# Altium PCB Vertical Circuit Board.PcbDoc
Units mm, origin at the board's own origin, x right, y up, seen from the top; angles counter-clockwise.
Board outline 141 x 80 mm, 2 copper layers (Top Layer, Bottom Layer); 58 components, 57 nets, 183 pads, 8 vias.
Unrouted connection lines stored in the file: 3.
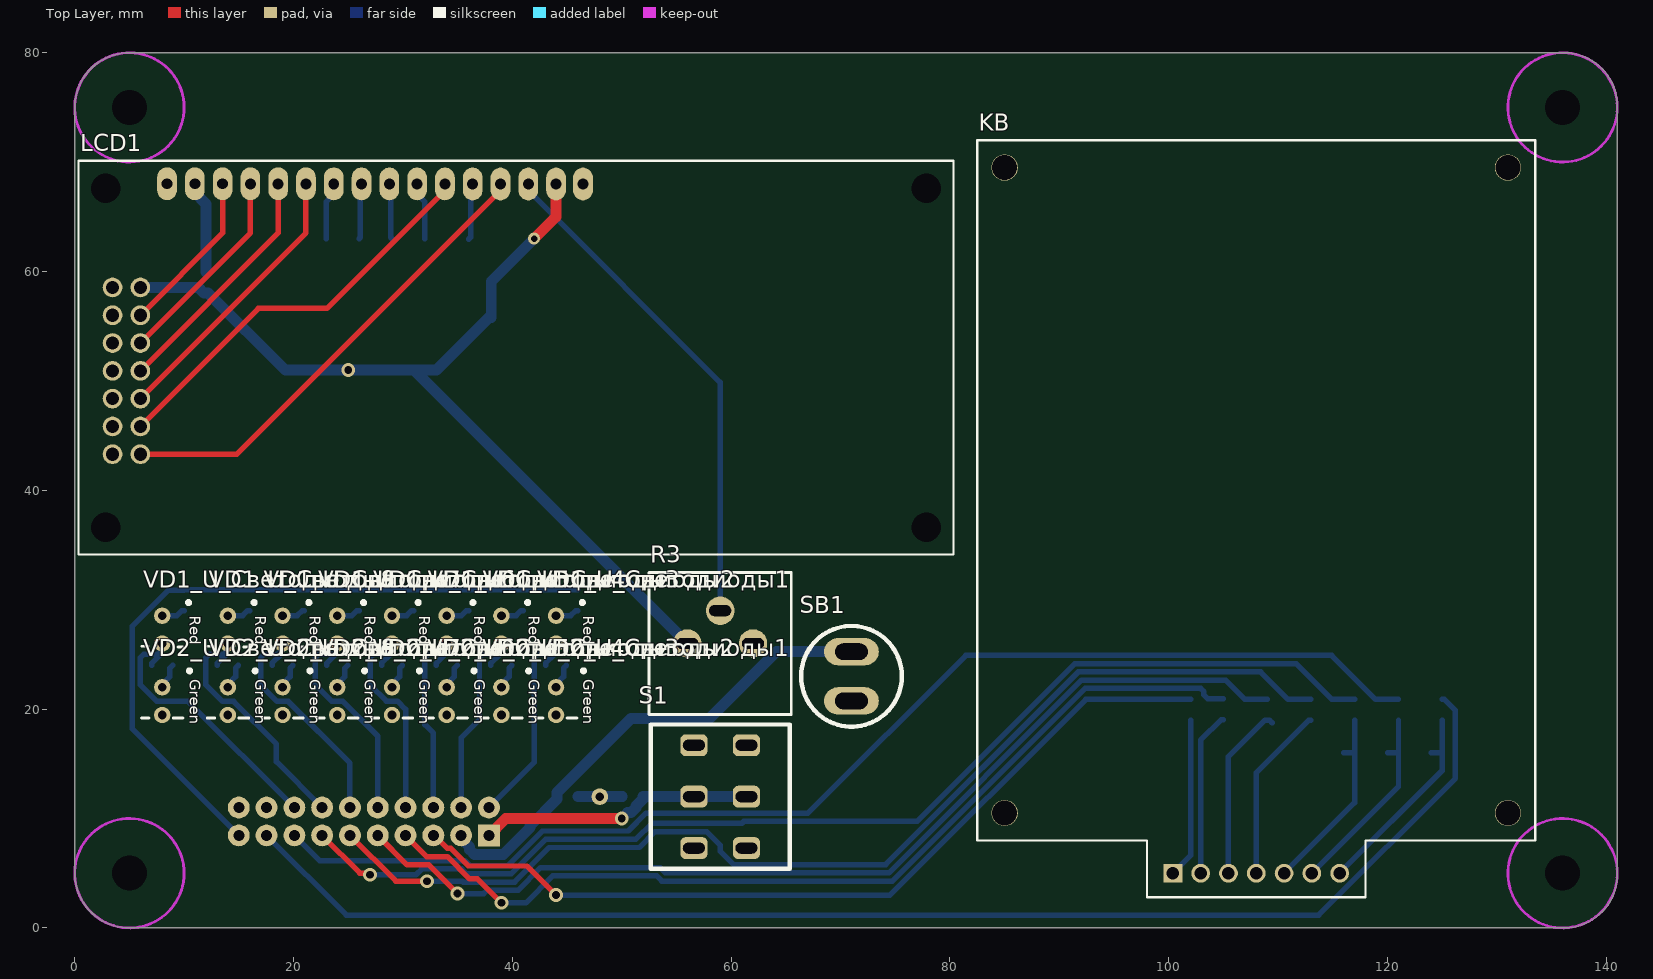
[diagram p0: Top Layer view]
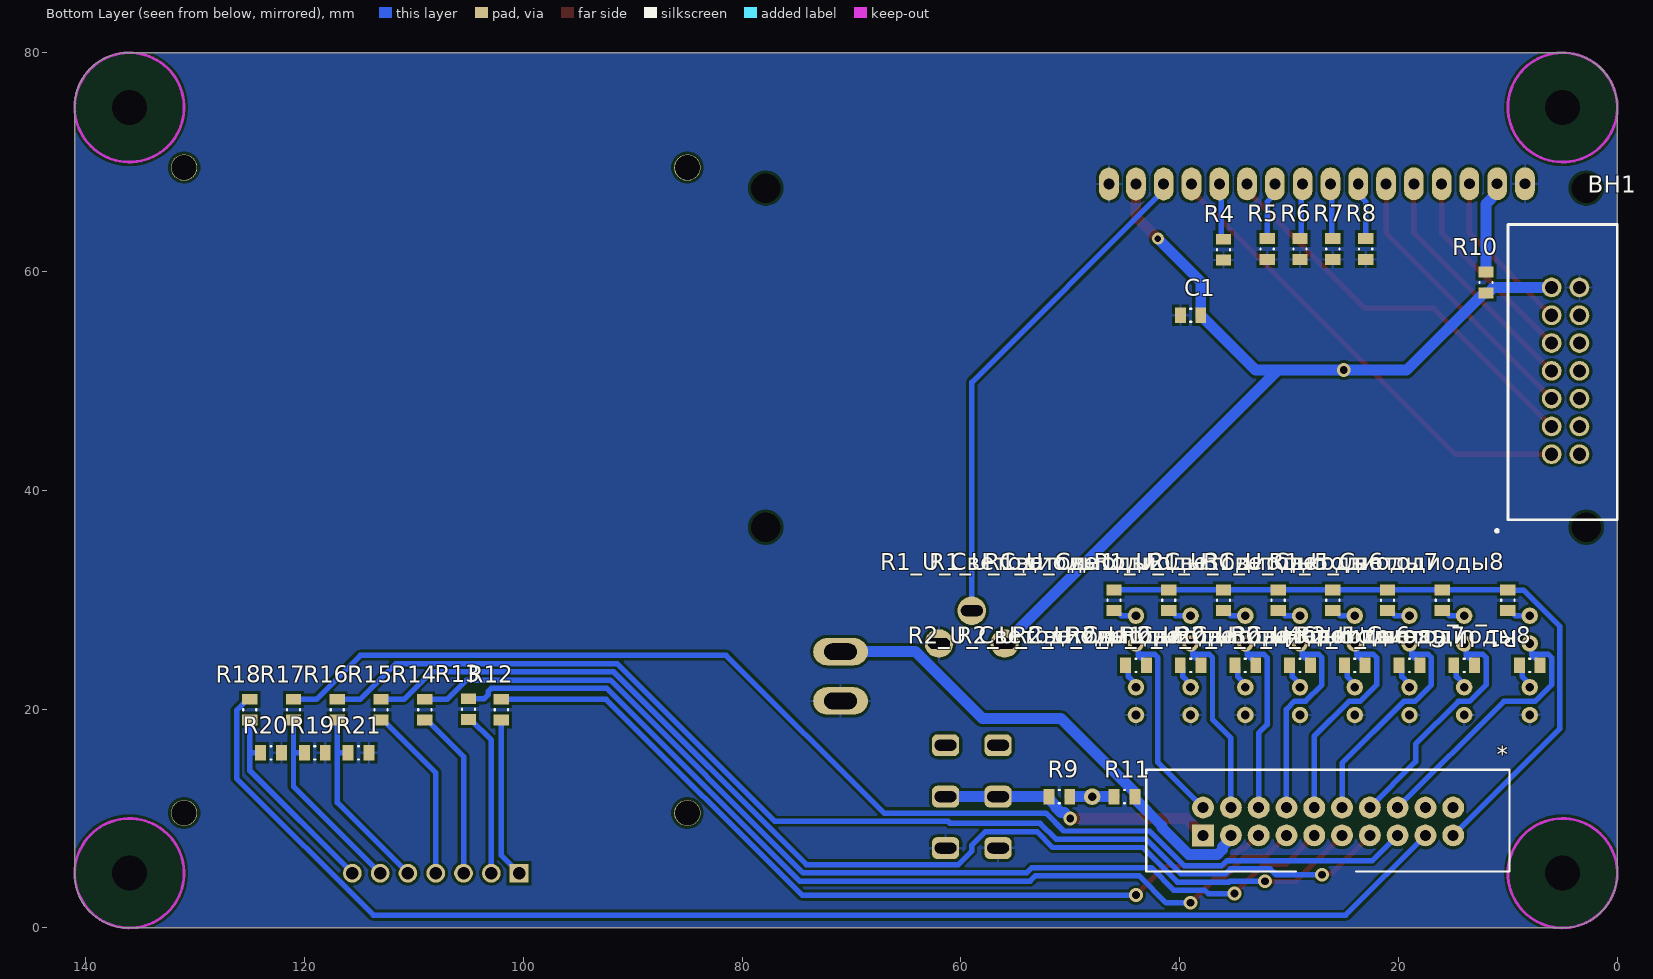
[diagram p1: Bottom Layer view, seen from below]
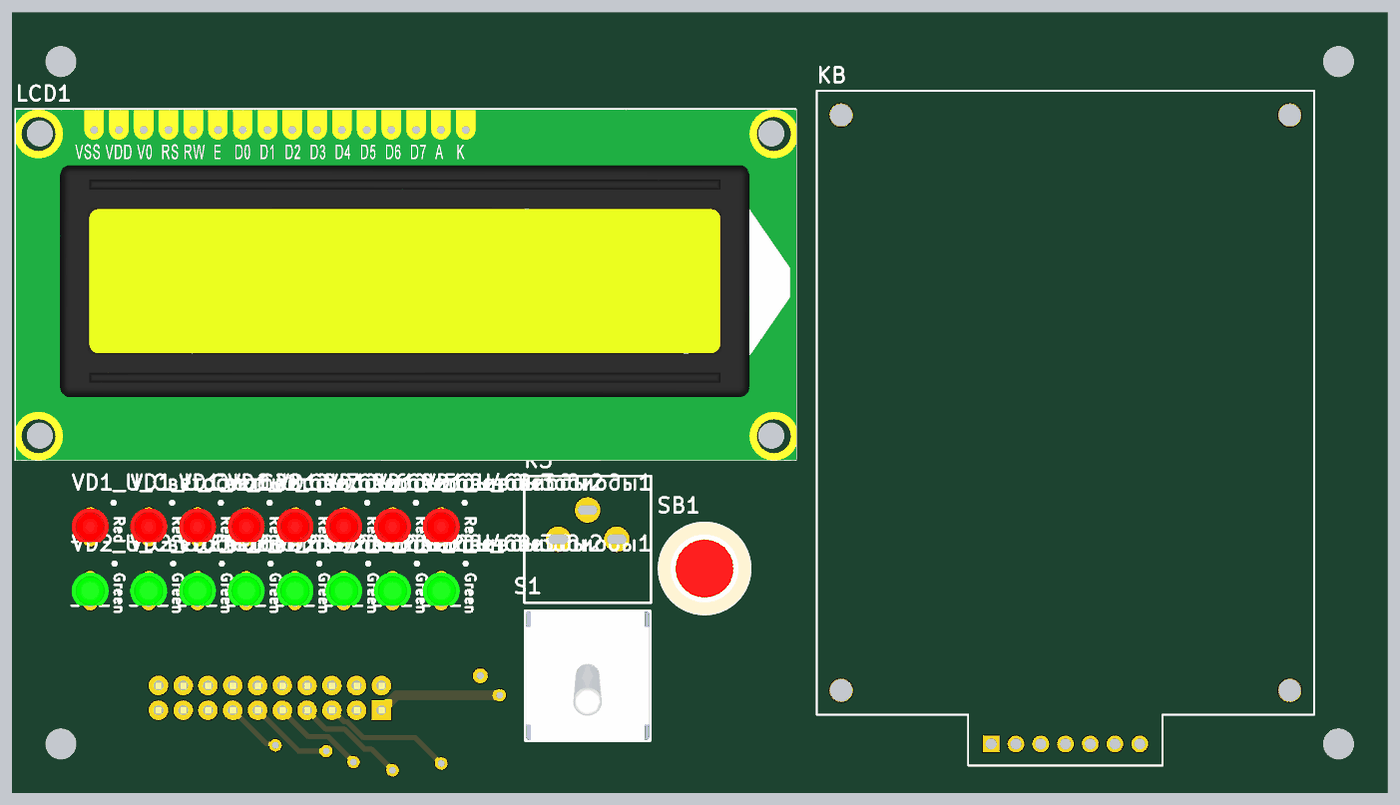
[diagram p2: 3D render of the assembled board from above, using the file's embedded part models]
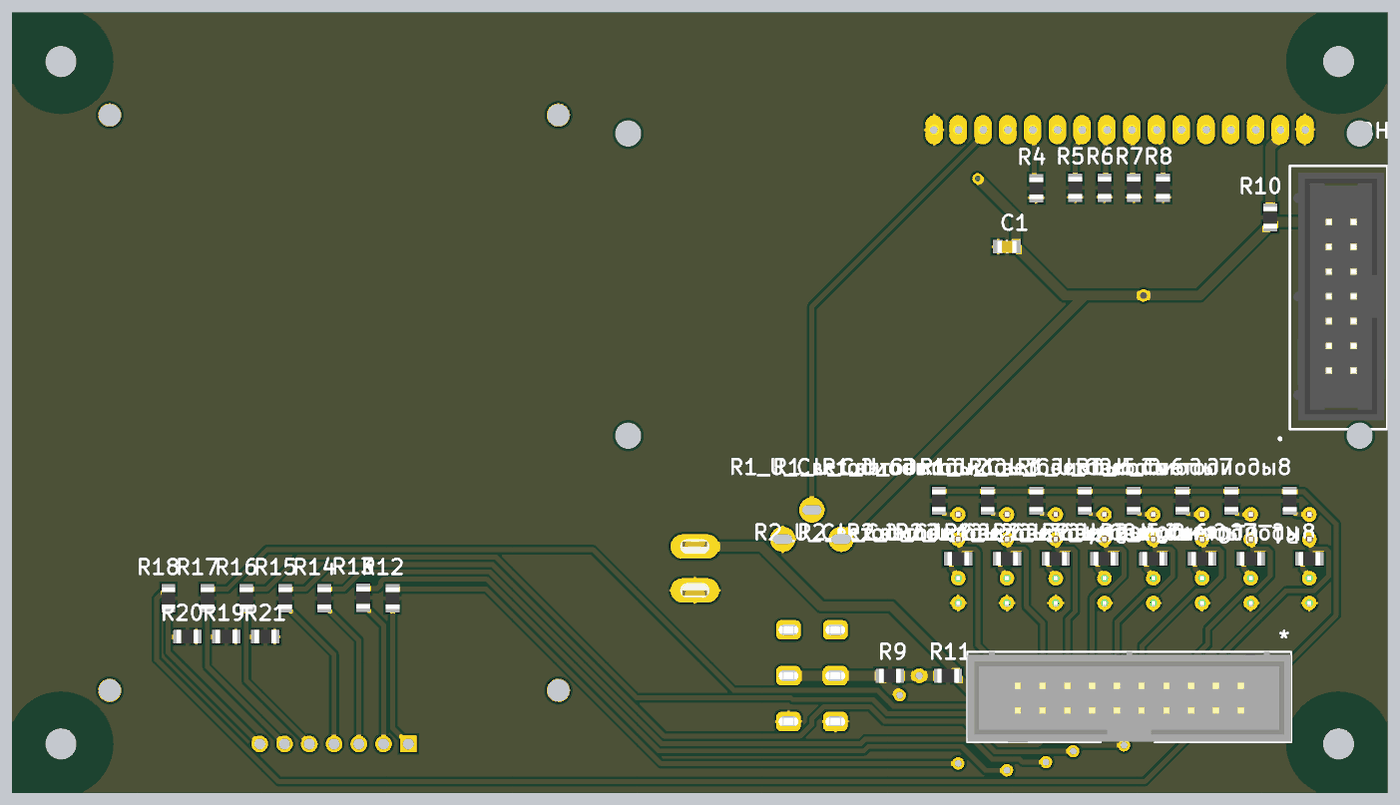
[diagram p3: 3D render of the assembled board from below, using the file's embedded part models]

## Layer stack, top to bottom
Top Solder: solder mask 0.0102, Solder Resist, Dk 3.5
Top Layer: signal copper 0.0356
Dielectric 1: dielectric 0.32, FR-4, Dk 4.8
Bottom Layer: signal copper 0.0356
Bottom Solder: solder mask 0.0102, Solder Resist, Dk 3.5

## Board outline
0,5 ccw(c5,5) 5,0 95,0 136.25,0 ccw(c136.125,4.875) 141,5 141,75 ccw(c136.125,75.125) 136.25,80 5,80 ccw(c5,75) 0,75

## Design rules (kind name [scope] priority, off if disabled: settings)
Clearance [All] p1: gap=0.254 ignorepadtopadclearanceinfootprint=FALSE except(0: Arc-Hole Track-Hole SMDPad-Hole THPad-Hole Via-Hole Fill-Hole Poly-Hole Region-Hole Text-Hole)
Height [All] p1: minheight=0 maxheight=50 prefheight=12.7
PolygonConnect [All] p1: connectstyle=Relief reliefconductorwidth=0.254 reliefentries=4 polygonreliefangle="90 Angle" airgapwidth=0.254
RoutingVias [All] p1: holewidth=0.711 width=1.27 viastyle="Through Hole" minholewidth=0.711 minwidth=1.27 maxholewidth=0.711 maxwidth=1.27
SolderMaskExpansion [All] p1: expansion=0.102 istentingtop=FALSE
Width [All] p1: maxlimit=1 minlimit=0.254 preferedwidth=0.5 minimp=50.000000 maximp=50.000000 favimp=50.000000
29 further rules are at their usual default settings.

## Components (designator, comment, footprint, x,y, rotation, side; value= is the part's Value field where it differs from the comment)
* "BH20" IDC20 27.319,13.286 r90 bottom
BH1 "BH14(1)" "BH-14 (DS1013-14S) (IDC-14MS)" 6,43.3 r90 bottom
C1 "*" C(ceramic) 39,56 r180 bottom
KB "AK-304" AK-304-N-BBW 108,40 r0 top
LCD1 "BCB1602" BCB1602 2.84,36.623 r0 top
R1_U_Светодиоды1 "R" R 46,29.95 r90 bottom (schematic designator R1)
R1_U_Светодиоды2 "R" R 41,29.95 r90 bottom (schematic designator R1)
R1_U_Светодиоды3 "R" R 36,29.95 r90 bottom (schematic designator R1)
R1_U_Светодиоды4 "R" R 31,29.95 r90 bottom (schematic designator R1)
R1_U_Светодиоды5 "R" R 26,29.95 r90 bottom (schematic designator R1)
R1_U_Светодиоды6 "R" R 21,29.95 r90 bottom (schematic designator R1)
R1_U_Светодиоды7 "R" R 16,29.95 r90 bottom (schematic designator R1)
R1_U_Светодиоды8 "R" R 10,29.95 r90 bottom (schematic designator R1)
R2_U_Светодиоды1 "R" R 44,24 r180 bottom (schematic designator R2)
R2_U_Светодиоды2 "R" R 39,24 r180 bottom (schematic designator R2)
R2_U_Светодиоды3 "R" R 34,24 r180 bottom (schematic designator R2)
R2_U_Светодиоды4 "R" R 29,24 r180 bottom (schematic designator R2)
R2_U_Светодиоды5 "R" R 24,24 r180 bottom (schematic designator R2)
R2_U_Светодиоды6 "R" R 19,24 r180 bottom (schematic designator R2)
R2_U_Светодиоды7 "R" R 14,24 r180 bottom (schematic designator R2)
R2_U_Светодиоды8 "R" R 8,24 r180 bottom (schematic designator R2)
R3 "" R(подстр) 59,26 r0 top
R4 "*" R 36,62 r270 bottom
R5 "*" R 32,62.05 r270 bottom
R6 "*" R 29,62.05 r270 bottom
R7 "*" R 26,62.05 r270 bottom
R8 "*" R 23,62.05 r270 bottom
R9 "R" R 51,12 r0 bottom
R10 "*" R 12,59 r270 bottom
R11 "*" R 45.05,12 r180 bottom
R12 "R" R 102,19.95 r270 bottom
R13 "R" R 105,20 r270 bottom
R14 "R" R 109,19.95 r270 bottom
R15 "R" R 113,19.95 r270 bottom
R16 "R" R 117,19.95 r270 bottom
R17 "R" R 121,19.95 r270 bottom
R18 "R" R 125,19.95 r270 bottom
R19 "R" R 119.05,16 r0 bottom
R20 "R" R 123.05,16 r0 bottom
R21 "R" R 115.05,16 r0 bottom
S1 "(?)тумблер" MTS-2 59,12 r180 top
SB1 "ПУСК" кнопка 71,23 r180 top
VD1_U_Светодиоды1 "L-934(RED)" L-934(RED) 44,28.54 r270 top (schematic designator VD1)
VD1_U_Светодиоды2 "L-934(RED)" L-934(RED) 39,28.54 r270 top (schematic designator VD1)
VD1_U_Светодиоды3 "L-934(RED)" L-934(RED) 34,28.54 r270 top (schematic designator VD1)
VD1_U_Светодиоды4 "L-934(RED)" L-934(RED) 29,28.54 r270 top (schematic designator VD1)
VD1_U_Светодиоды5 "L-934(RED)" L-934(RED) 24,28.54 r270 top (schematic designator VD1)
VD1_U_Светодиоды6 "L-934(RED)" L-934(RED) 19,28.54 r270 top (schematic designator VD1)
VD1_U_Светодиоды7 "L-934(RED)" L-934(RED) 14,28.54 r270 top (schematic designator VD1)
VD1_U_Светодиоды8 "L-934(RED)" L-934(RED) 8,28.54 r270 top (schematic designator VD1)
VD2_U_Светодиоды1 "L-934(GREEN)" L-934(GREEN) 44,22 r270 top (schematic designator VD2)
VD2_U_Светодиоды2 "L-934(GREEN)" L-934(GREEN) 39,22 r270 top (schematic designator VD2)
VD2_U_Светодиоды3 "L-934(GREEN)" L-934(GREEN) 34,22 r270 top (schematic designator VD2)
VD2_U_Светодиоды4 "L-934(GREEN)" L-934(GREEN) 29,22 r270 top (schematic designator VD2)
VD2_U_Светодиоды5 "L-934(GREEN)" L-934(GREEN) 24,22 r270 top (schematic designator VD2)
VD2_U_Светодиоды6 "L-934(GREEN)" L-934(GREEN) 19,22 r270 top (schematic designator VD2)
VD2_U_Светодиоды7 "L-934(GREEN)" L-934(GREEN) 14,22 r270 top (schematic designator VD2)
VD2_U_Светодиоды8 "L-934(GREEN)" L-934(GREEN) 8,22 r270 top (schematic designator VD2)

## Footprints (in the part's own frame and the unit in brackets; to place one, negate y for a bottom-side part, rotate by r counter-clockwise, add the part's x,y. Pads: shape width x height; smd on the part's side, far side on the other; paste and mask are expansions set on the pad)
AK-304-N-BBW [mm]
  rect 1.71x1.71 hole 1.14: 1(-7.62,-35)
  round 1.71 hole 1.14: 2(-5.08,-35) 3(-2.54,-35) 4(0,-35) 5(2.54,-35) 6(5.08,-35) 7(7.62,-35)
  round 2.4 hole 2.3 unplated: ""(-23,-29.5) ""(-23,29.5) ""(23,-29.5) ""(23,29.5)
  silkscreen extent -25.5,-37.2 25.5,32
BCB1602 [mm]
  oval 1.8x3 hole 1: 1(43.62,31.376) 2(41.16,31.377) 3(38.62,31.379) 4(36.08,31.381) 5(33.54,31.382) 6(31,31.384) 7(28.46,31.385) 8(25.92,31.387) 9(23.38,31.389) 10(20.84,31.39) 11(18.3,31.392) 12(15.76,31.394) 13(13.22,31.395) 14(10.68,31.397) 15(8.14,31.398) 16(5.6,31.4)
  round 2.5 hole 2.7 unplated: *(0,0) *(0,31) *(75,0) *(75,31)
  silkscreen extent -2.5,-2.5 77.5,33.5, body extent -2.43,-2.55 77.57,33.45, height 17.05
"BH-14 (DS1013-14S) (IDC-14MS)" [mm]
  round 1.8 hole 1.2: 1(0,0) 2(2.54,0) 3(5.08,0) 4(7.62,0) 5(10.16,0) 6(12.7,0) 7(15.24,0) 8(0,-2.54) 9(2.54,-2.54) 10(5.08,-2.54) 11(7.62,-2.54) 12(10.16,-2.54) 13(12.7,-2.54) 14(15.24,-2.54)
  silkscreen extent -7.12,-6 21,5.13, body extent -5.1,-5.7 20.3,3.65, height 10.25
C(ceramic) [mm] "Chip Capacitor, 2-Leads, Body 2,00x1,25mm, IPC Medium Density"
  rect 1x1.4 smd: 1(-0.925,0) 2(0.925,0)
  silkscreen extent -0.05,-0.6 0.05,0.6, body extent -1,-0.63 1,0.63, height 1.3
IDC20 [mm]
  rect 2x2 hole 1: 1(-4.826,10.541)
  round 2 hole 1: 2(-4.826,8.001) 3(-4.826,5.461) 4(-4.826,2.921) 5(-4.826,0.381) 6(-4.826,-2.159) 7(-4.826,-4.699) 8(-4.826,-7.239) 9(-4.826,-9.779) 10(-4.826,-12.319) 11(-2.286,10.541) 12(-2.286,8.001) 13(-2.286,5.461) 14(-2.286,2.921) 15(-2.286,0.381) 16(-2.286,-2.159) 17(-2.286,-4.699) 18(-2.286,-7.239) 19(-2.286,-9.779) 20(-2.286,-12.319)
  silkscreen extent -8.13,-17.46 1.17,15.74, body extent -8.13,-17.46 1.17,15.74, height 9.1
L-934(GREEN) [mm]
  round 1.5 hole 0.8: 1(0,0) 2(2.54,0)
  silkscreen extent -1.64,-1.89 2.81,2.64, body extent -0.61,-1.9 2.81,1.9, height 5.64
L-934(RED) [mm]
  round 1.5 hole 0.8: 1(0,0) 2(2.54,0)
  silkscreen extent -1.34,-1.85 2.85,2.54, body extent -0.65,-1.9 2.85,1.9, height 6
MTS-2 [mm]
  rrect50% 2.5x2 hole 1 slot 2 at 0 deg: 1(-2.4,4.7) 1(2.4,4.7) 2(-2.4,0) 2(2.4,0) 3(-2.4,-4.7) 3(2.4,-4.7)
  silkscreen extent -6.35,-6.6 6.35,6.6, body extent -6.35,-6.6 6.35,6.6, height 29.34
R [mm] "Chip Resistor, 2-Leads, Body 2,10x1,30mm, IPC Medium Density"
  rect 1x1.4 smd: 1(-0.95,0) 2(0.95,0)
  silkscreen extent -0.05,-0.6 0.05,0.6, body extent -1.1,-0.7 1.1,0.7, height 0.6
R(подстр) [mm]
  round 2.6 hole 1 slot 2 at 0 deg: 1(-3,0) 2(3,0) 3(0,3)
  silkscreen extent -6.5,-6.5 6.5,6.5, body extent -6.5,-6.3 6.3,6.5, height 6
кнопка [mm]
  oval 5x2.5 hole 1.5 slot 3 at 0 deg: 1(0,2.25) 2(0,-2.25)
  silkscreen extent -4.6,-4.6 4.6,4.6, body extent -4.75,-4.75 4.75,4.75, height 22.6

## Part data
BH1: library part BH14(3)
C1: library part C(ceramic)
R3: library part R(подстр)
R4 R5 R6 R7 R8 R10 R11: library part R
SB1: library part кнопка

## Free pads (board coordinates)
  round 1.524 hole 0.762: 14(48,12)
  round 1.6 hole 3.2 unplated: A(5,75) B(136,75) C(136,5) D(5,5)

## Via types
v1: diameter 1.27, hole 0.711, Top Layer to Bottom Layer, 7 vias
v2: diameter 1.1, hole 0.6, Top Layer to Bottom Layer, 1 vias

## Nets (pads, with @x,y where several pads share a name; then routed paths per layer and width w, separated by ;. In a path a pad name is that pad's centre, name@x,y a point inside that pad or via, vN(x,y) a via of type N, cw(c..) or ccw(c..) an arc to the next point about the centre after c; other vN are vias at no path point)
+3.3: pad.14 R9.1 R11.1 | length 4
  Bottom Layer w1: R11.1 pad.14 R9.1
+5: BH1.7 C1.2 LCD1.2 R3.1 R10.2 | length 87.2
  Top Layer w1: v2(42,63) 44,65 LCD1.2
  Bottom Layer w1: BH1.7 11.31,58.54 11.8,58.05 R10.2 12.2,58.05 19.25,51 v1(25,51) 31,51 ; v2(42,63) 38.075,59.075 C1.2 38.075,55.8 37.875,55.8 33.075,51 31,51 ; R3.1 31,51
GND: BH1.14 C1.1 LCD1.1 LCD1.16 R3.2 R4.2 R5.2 R6.2 R7.2 R8.2 R19.1 R20.1 R21.1 S1.1 SB1.1 VD2_U_Светодиоды1.2 VD2_U_Светодиоды2.2 VD2_U_Светодиоды3.2 VD2_U_Светодиоды4.2 VD2_U_Светодиоды5.2 VD2_U_Светодиоды6.2 VD2_U_Светодиоды7.2 VD2_U_Светодиоды8.2
Net*_1: *.1 R9.2 S1.2 | length 25.2
  Top Layer w1: *.1 39.4,10 v1(50,10)
  Bottom Layer w1: v1(50,10) 50.546,10.546 50.862,10.546 51.304,10.988 51.304,11.154 51.95,11.8 R9.2 56.6,12 S1.2@61.4,12
Net*_2: *.2 R11.2 SB1.2 | length 44.8
  Bottom Layer w1: *.2 35.32,8.189 36.106,7.403 36.106,7.148 36.548,6.706 39.172,6.706 41.636,9.17 41.636,9.336 44.1,11.8 R11.2 44.1,12.366 50.865,19.131 58.036,19.131 64.155,25.25 SB1.2
Net*_3: *.3 R12.1 | length 78.9
  Top Layer w0.5: *.3 32.888,8.46 34.072,7.277 34.376,7.277 35.993,5.66 41.34,5.66 v1(44,3)
  Bottom Layer w0.5: v1(44,3) 74.516,3 92.416,20.9 R12.1
Net*_4: *.4 R13.1 | length 86.4
  Top Layer w0.5: *.4 32.177,6.523 34.064,6.523 36.101,4.486 36.815,4.486 v1(39,2.301)
  Bottom Layer w0.5: v1(39,2.301) 41.235,2.301 43.688,4.754 53.206,4.754 53.672,4.288 74.738,4.288 92.354,21.904 102.909,21.904 103.204,21.609 103.204,21.296 103.55,20.95 R13.1
Net*_5: *.5 R14.1 | length 92.7
  Top Layer w0.5: *.5 30.391,5.769 32.37,5.769 v1(35,3.139)
  Bottom Layer w0.5: v1(35,3.139) 37.387,3.139 37.688,3.44 38.528,3.44 40.525,3.44 42.593,5.508 53.518,5.508 53.984,5.042 74.425,5.042 92.041,22.658 105.205,22.658 106.963,20.9 R14.1
Net*_6: *.6 R15.1 | length 101.4
  Top Layer w0.5: *.6 29.351,4.269 v1(32.207,4.269)
  Bottom Layer w0.5: v1(32.207,4.269) 32.216,4.278 35.423,4.278 35.507,4.194 40.213,4.194 43.372,7.353 51.611,7.353 53.062,8.804 57.766,8.804 59,7.57 59,7.03 60.234,5.796 74.113,5.796 91.729,23.412 108.401,23.412 110.913,20.9 R15.1
Net*_7: *.7 R16.1 | length 105.6
  Top Layer w0.5: *.7 26.072,5.008 26.853,5.008 v1(27,4.861)
  Bottom Layer w0.5: v1(27,4.861) 31.188,4.861 31.735,5.408 35.36,5.408 35.819,4.948 39.901,4.948 43.06,8.107 51.298,8.107 52.749,9.558 60.988,9.558 61.172,9.742 76.993,9.742 91.417,24.166 111.647,24.166 114.913,20.9 R16.1
Net*_8: *.8 R17.1 | length 111.7
  Bottom Layer w0.5: *.8 22.378,6.162 35.672,6.162 36.132,5.702 39.588,5.702 42.747,8.861 50.597,8.861 52.232,10.496 67.026,10.496 81.45,24.92 114.893,24.92 118.913,20.9 R17.1
Net*_9: *.9 R18.1 | length 124.7
  Bottom Layer w0.5: *.9 24.838,1.162 113.704,1.162 126.204,13.662 126.204,19.896 125.2,20.9 R18.1
NetBH1_1: BH1.1 LCD1.4 | length 43.5
  Top Layer w0.5: BH1.1 14.817,43.3 38.92,67.403 LCD1.4
NetBH1_2: BH1.2 LCD1.6 | length 37.4
  Top Layer w0.5: BH1.2 16.783,56.623 23.057,56.623 33.84,67.406 LCD1.6
NetBH1_3: BH1.3 LCD1.11 | length 25.9
  Top Layer w0.5: BH1.3 21.14,63.52 LCD1.11
NetBH1_4: BH1.4 LCD1.12 | length 22.3
  Top Layer w0.5: BH1.4 18.6,63.52 LCD1.12
NetBH1_5: BH1.5 LCD1.13 | length 18.7
  Top Layer w0.5: BH1.5 16.06,63.52 LCD1.13
NetBH1_6: BH1.6 LCD1.14 | length 15.1
  Top Layer w0.5: BH1.6 13.52,63.52 LCD1.14
NetKB_1: KB.1 R12.2 | length 14.7
  Bottom Layer w0.5: KB.1 102,6.62 R12.2
NetKB_2: KB.2 R13.2 | length 15
  Bottom Layer w0.5: KB.2 102.92,17.17 104.8,19.05 R13.2
NetKB_3: KB.3 R14.2 | length 16.2
  Bottom Layer w0.5: KB.3 105.46,15.66 108.8,19 R14.2 109.2,19 R14.2@109.46,18.74
NetKB_4: KB.4 R15.2 | length 16.2
  Bottom Layer w0.5: KB.4 108,14.2 112.8,19 R15.2
NetKB_5: KB.5 R16.2 R21.2 | length 17.7
  Bottom Layer w0.5: KB.5 117,11.46 117,16 ; R21.2 117,16 ; R16.2 117,16
NetKB_6: KB.6 R17.2 R19.2 | length 18.3
  Bottom Layer w0.5: KB.6 121,12.92 121,15.96 ; R19.2 120.96,16 121,15.96 ; R17.2 121,15.96
NetKB_7: KB.7 R18.2 R20.2 | length 18.9
  Bottom Layer w0.5: KB.7 125,14.38 125,16 ; R20.2 125,16 ; R18.2 125,16
NetLCD1_3: LCD1.3 R3.3 | length 46.3
  Bottom Layer w0.5: LCD1.3 41.46,67.402 59,49.862 R3.3
NetLCD1_5: LCD1.5 R4.1 | length 5.2
  Bottom Layer w0.5: R4.1 36.19,63.14 36.19,67.815 LCD1.5
NetLCD1_7: LCD1.7 R5.1 | length 5.3
  Bottom Layer w0.5: LCD1.7 31.3,67.056 32,66.356 R5.1
NetLCD1_8: LCD1.8 R6.1 | length 5.1
  Bottom Layer w0.5: LCD1.8 28.88,67.89 28.88,63.12 R6.1
NetLCD1_9: LCD1.9 R7.1 | length 5.1
  Bottom Layer w0.5: R7.1 26.11,63.11 26.11,67.901 LCD1.9
NetLCD1_10: LCD1.10 R8.1 | length 5.3
  Bottom Layer w0.5: R8.1 23,66.381 23.68,67.061 LCD1.10
NetLCD1_15: LCD1.15 R10.1 | length 8.5
  Bottom Layer w1: LCD1.15 10.98,67.205 12,66.185 R10.1
NetR1_U_Светодиоды1_1: R1_U_Светодиоды1.1 VD1_U_Светодиоды1.1 | length 2.2
  Bottom Layer w0.5: VD1_U_Светодиоды1.1 45.34,28.54 45.8,29 R1_U_Светодиоды1.1
NetR1_U_Светодиоды2_1: R1_U_Светодиоды2.1 VD1_U_Светодиоды2.1 | length 2.5
  Bottom Layer w0.5: VD1_U_Светодиоды2.1@39.191,28.731 VD1_U_Светодиоды2.1 40.34,28.54 40.8,29 R1_U_Светодиоды2.1
NetR1_U_Светодиоды3_1: R1_U_Светодиоды3.1 VD1_U_Светодиоды3.1 | length 2.2
  Bottom Layer w0.5: VD1_U_Светодиоды3.1 35.34,28.54 35.8,29 R1_U_Светодиоды3.1
NetR1_U_Светодиоды4_1: R1_U_Светодиоды4.1 VD1_U_Светодиоды4.1 | length 2.2
  Bottom Layer w0.5: VD1_U_Светодиоды4.1 30.34,28.54 30.8,29 R1_U_Светодиоды4.1
NetR1_U_Светодиоды5_1: R1_U_Светодиоды5.1 VD1_U_Светодиоды5.1 | length 2.5
  Bottom Layer w0.5: VD1_U_Светодиоды5.1@24.191,28.731 VD1_U_Светодиоды5.1 25.34,28.54 25.8,29 R1_U_Светодиоды5.1
NetR1_U_Светодиоды6_1: R1_U_Светодиоды6.1 VD1_U_Светодиоды6.1 | length 2.5
  Bottom Layer w0.5: VD1_U_Светодиоды6.1@19.191,28.731 VD1_U_Светодиоды6.1 20.34,28.54 20.8,29 R1_U_Светодиоды6.1
NetR1_U_Светодиоды7_1: R1_U_Светодиоды7.1 VD1_U_Светодиоды7.1 | length 2.5
  Bottom Layer w0.5: VD1_U_Светодиоды7.1@14.191,28.731 VD1_U_Светодиоды7.1 15.34,28.54 15.8,29 R1_U_Светодиоды7.1
NetR1_U_Светодиоды8_1: R1_U_Светодиоды8.1 VD1_U_Светодиоды8.1 | length 2.2
  Bottom Layer w0.5: VD1_U_Светодиоды8.1 9.34,28.54 9.8,29 R1_U_Светодиоды8.1
NetR2_U_Светодиоды1_1: R2_U_Светодиоды1.1 VD2_U_Светодиоды1.1 | length 2.4
  Bottom Layer w0.5: VD2_U_Светодиоды1.1 44,22.271 44.7,22.971 44.7,23.75 R2_U_Светодиоды1.1
NetR2_U_Светодиоды2_1: R2_U_Светодиоды2.1 VD2_U_Светодиоды2.1 | length 2.4
  Bottom Layer w0.5: VD2_U_Светодиоды2.1 39,22.271 39.7,22.971 39.7,23.75 R2_U_Светодиоды2.1
NetR2_U_Светодиоды3_1: R2_U_Светодиоды3.1 VD2_U_Светодиоды3.1 | length 2.4
  Bottom Layer w0.5: VD2_U_Светодиоды3.1 34,22.271 34.7,22.971 34.7,23.75 R2_U_Светодиоды3.1
NetR2_U_Светодиоды4_1: R2_U_Светодиоды4.1 VD2_U_Светодиоды4.1 | length 2.4
  Bottom Layer w0.5: VD2_U_Светодиоды4.1 29,22.271 29.7,22.971 29.7,23.75 R2_U_Светодиоды4.1
NetR2_U_Светодиоды5_1: R2_U_Светодиоды5.1 VD2_U_Светодиоды5.1 | length 2.4
  Bottom Layer w0.5: VD2_U_Светодиоды5.1 24,22.271 24.7,22.971 24.7,23.75 R2_U_Светодиоды5.1
NetR2_U_Светодиоды6_1: R2_U_Светодиоды6.1 VD2_U_Светодиоды6.1 | length 2.4
  Bottom Layer w0.5: VD2_U_Светодиоды6.1 19,22.271 19.7,22.971 19.7,23.75 R2_U_Светодиоды6.1
NetR2_U_Светодиоды7_1: R2_U_Светодиоды7.1 VD2_U_Светодиоды7.1 | length 2.4
  Bottom Layer w0.5: VD2_U_Светодиоды7.1 14,22.271 14.7,22.971 14.7,23.75 R2_U_Светодиоды7.1
NetR2_U_Светодиоды8_1: R2_U_Светодиоды8.1 VD2_U_Светодиоды8.1 | length 2.4
  Bottom Layer w0.5: VD2_U_Светодиоды8.1 8,22.271 8.7,22.971 8.7,23.75 R2_U_Светодиоды8.1
ГБ1: *.11 R2_U_Светодиоды1.2 VD1_U_Светодиоды1.2 | length 19.8
  Bottom Layer w0.5: *.11 42,15.14 42,24.707 42.293,25 43.767,25 43.809,24.959 ; R2_U_Светодиоды1.2 43.05,24.2 43.809,24.959 ; VD1_U_Светодиоды1.2 43.809,25.809 43.809,24.959
ГБ2: *.12 R2_U_Светодиоды2.2 VD1_U_Светодиоды2.2 | length 18.7
  Bottom Layer w0.5: *.12 35.32,17.363 37,19.043 37,24.707 37.293,25 38.767,25 38.809,24.959 ; R2_U_Светодиоды2.2 38.05,24.2 38.809,24.959 ; VD1_U_Светодиоды2.2 38.809,25.809 38.809,24.959
ГБ3: *.13 R2_U_Светодиоды3.2 VD1_U_Светодиоды3.2 | length 18.4
  Bottom Layer w0.5: *.13 32.78,17.813 32,18.593 32,24.707 32.293,25 33.767,25 33.809,24.959 ; R2_U_Светодиоды3.2 33.05,24.2 33.809,24.959 ; VD1_U_Светодиоды3.2 33.809,25.809 33.809,24.959
ГБ4: *.14 R2_U_Светодиоды4.2 VD1_U_Светодиоды4.2 | length 20
  Bottom Layer w0.5: R2_U_Светодиоды4.2 28.05,24.2 28.809,24.959 ; VD1_U_Светодиоды4.2 28.809,25.809 28.809,24.959 ; *.14 30.254,11.014 30.254,19.979 29.503,20.73 28.497,20.73 27,22.227 27,24.707 27.293,25 28.767,25 28.809,24.959
ГБ5: *.15 R2_U_Светодиоды5.2 VD1_U_Светодиоды5.2 | length 21
  Bottom Layer w0.5: R2_U_Светодиоды5.2 23.05,24.2 23.809,24.959 ; VD1_U_Светодиоды5.2 23.809,25.809 23.809,24.959 ; *.15 27.7,17.533 24.519,20.714 23.513,20.714 22,22.227 22,24.707 22.293,25 23.767,25 23.809,24.959
ГБ6: *.16 R2_U_Светодиоды6.2 VD1_U_Светодиоды6.2 | length 22
  Bottom Layer w0.5: R2_U_Светодиоды6.2 18.05,24.2 18.809,24.959 ; VD1_U_Светодиоды6.2 18.809,25.809 18.809,24.959 ; *.16 25.16,15.073 19.519,20.714 18.513,20.714 17,22.227 17,24.707 17.293,25 18.767,25 18.809,24.959
ГБ7: *.17 R2_U_Светодиоды7.2 VD1_U_Светодиоды7.2 | length 23
  Bottom Layer w0.5: R2_U_Светодиоды7.2 13.05,24.2 13.809,24.959 ; VD1_U_Светодиоды7.2 13.809,25.809 13.809,24.959 ; *.17 18.426,15.194 18.426,16.807 14.519,20.714 13.513,20.714 12,22.227 12,24.707 12.293,25 13.767,25 13.809,24.959
ГБ8: *.18 R2_U_Светодиоды8.2 VD1_U_Светодиоды8.2 | length 25.6
  Bottom Layer w0.5: R2_U_Светодиоды8.2 7.05,24.2 7.809,24.959 ; VD1_U_Светодиоды8.2 7.809,25.809 7.809,24.959 ; *.18 10.366,20.714 7.513,20.714 6,22.227 6,24.707 6.293,25 7.767,25 7.809,24.959
РИ: *.10 R1_U_Светодиоды1.2 R1_U_Светодиоды2.2 R1_U_Светодиоды3.2 R1_U_Светодиоды4.2 R1_U_Светодиоды5.2 R1_U_Светодиоды6.2 R1_U_Светодиоды7.2 R1_U_Светодиоды8.2 | length 65.3
  Bottom Layer w0.5: *.10 5.246,18.214 5.246,27.559 8.55,30.863 9.963,30.863 R1_U_Светодиоды8.2 R1_U_Светодиоды7.2 R1_U_Светодиоды6.2 R1_U_Светодиоды5.2 R1_U_Светодиоды4.2 R1_U_Светодиоды3.2 R1_U_Светодиоды2.2 R1_U_Светодиоды1.2
pads on no net: *.19 *.20 BH1.8 BH1.9 BH1.10 BH1.11 BH1.12 BH1.13 KB. LCD1.* S1.3

## Polygon pours and split planes (outlines as drawn)
GND on Bottom Layer "GND_L02_P006" (solid, pour order 6): 5,80 5.5,79.5 7.5,79.5 10,77 10,73 7.5,70.5 5.5,70.5 5,70 4.5,70.5 2.5,70.5 0,73 0,5 0.5,5.5 0.5,7.5 3,10 7,10 9.5,7.5 9.5,5.5 10,5 9.5,4.5 9.5,2.5 7,0 135,0 133.5,1.5 132.5,1.5 131,3 131,7 132.5,8.5 133.5,8.5 135,10 138,10 141,7 141,74 140,73 140,71.5 139,71.5 137.5,70 134,70 131.5,72.5 131.5,74.5 131,75 131.5,75.5 131.5,77.5 134,80 135,80

## Keep-outs
Keep-Out Layer:
  circle w0.254: c136,5 r5
  circle w0.254: c136,75 r5
  circle w0.254: c5,5 r5
  circle w0.254: c5,75 r5

## Silkscreen, mask and mechanical layers (free items; w line width, h text height)
Mechanical 1:
  the board outline again, w0.254

## Text inside footprints (layer, text, board x,y; h text height)
VD1_U_Светодиоды1: Top Overlay "Red" at 46.5,28.54 h1 r270
VD1_U_Светодиоды2: Top Overlay "Red" at 41.5,28.54 h1 r270
VD1_U_Светодиоды3: Top Overlay "Red" at 36.5,28.54 h1 r270
VD1_U_Светодиоды4: Top Overlay "Red" at 31.5,28.54 h1 r270
VD1_U_Светодиоды5: Top Overlay "Red" at 26.5,28.54 h1 r270
VD1_U_Светодиоды6: Top Overlay "Red" at 21.5,28.54 h1 r270
VD1_U_Светодиоды7: Top Overlay "Red" at 16.5,28.54 h1 r270
VD1_U_Светодиоды8: Top Overlay "Red" at 10.5,28.54 h1 r270
VD2_U_Светодиоды1: Top Overlay "Green" at 46.5,22.75 h1 r270
VD2_U_Светодиоды2: Top Overlay "Green" at 41.5,22.75 h1 r270
VD2_U_Светодиоды3: Top Overlay "Green" at 36.5,22.75 h1 r270
VD2_U_Светодиоды4: Top Overlay "Green" at 31.5,22.75 h1 r270
VD2_U_Светодиоды5: Top Overlay "Green" at 26.5,22.75 h1 r270
VD2_U_Светодиоды6: Top Overlay "Green" at 21.5,22.75 h1 r270
VD2_U_Светодиоды7: Top Overlay "Green" at 16.5,22.75 h1 r270
VD2_U_Светодиоды8: Top Overlay "Green" at 10.5,22.75 h1 r270